# Altium PCB EHR.PcbDoc (part 4 of 4)
Units mm, origin at the board's own origin, x right, y up, seen from the top; angles counter-clockwise.
Board outline 200 x 110 mm, 2 copper layers (Top Layer, Bottom Layer), stack 1.646 mm thick; 17 components, 171 nets, 955 pads, 288 vias.
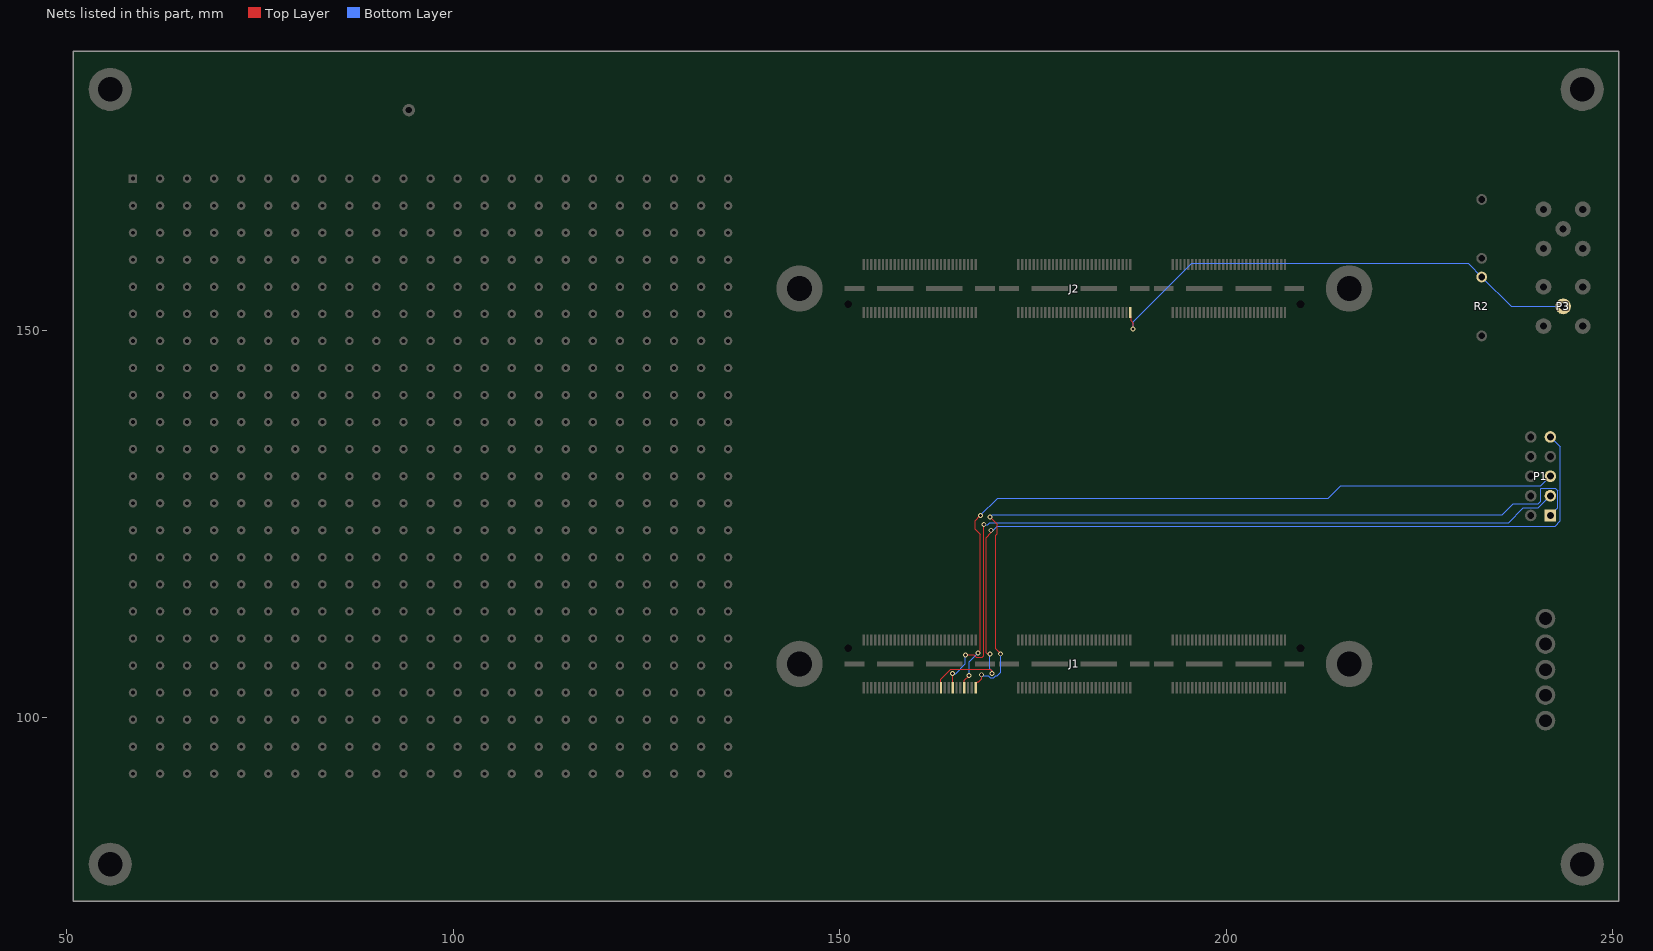
[diagram p4: the nets of this part, all layers, seen from the top]

## Via types
v1: diameter 0.64, hole 0.39, Top Layer to Bottom Layer, 288 vias

## Nets (pads, with @x,y where several pads share a name; then routed paths per layer and width w, separated by ;. In a path a pad name is that pad's centre, name@x,y a point inside that pad or via, vN(x,y) a via of type N, cw(c..) or ccw(c..) an arc to the next point about the centre after c; other vN are vias at no path point) (continued)
JTAG_TCK: J1.60 P1.1 | length 105.5
  Top Layer w0.15: J1.60@167.593,103.829 167.593,104.394 167.822,104.623 167.957,104.623 168.351,105.016 v1(168.351,105.512) ; v1(169.404,125.928) 170.344,124.988 170.344,123.726 170.171,123.553 170.171,108.869 v1(170.815,108.225)
  Bottom Layer w0.15: v1(168.351,105.512) 168.49,105.373 169.192,105.373 169.446,105.119 169.898,105.119 170.152,105.373 170.372,105.373 170.815,105.816 v1(170.815,108.225) ; v1(169.404,125.928) 169.714,126.238 235.737,126.238 237.16,127.66 240.347,127.66 240.665,127.978 240.665,129.565 240.741,129.642 242.57,129.642 242.91,129.302 242.91,127.095 P1.1@241.935,126.12
JTAG_TDI: J1.42 P1.9 | length 113.6
  Top Layer w0.15: J1.42@163.09,103.829 163.09,104.932 164.366,106.209 169.482,106.209 169.672,106.019 v1(169.672,105.664) ; v1(169.418,108.204) 169.088,108.204 168.924,108.368 168.924,123.267 169.608,123.952 169.545,124.015 v1(169.545,124.206)
  Bottom Layer w0.15: v1(169.418,108.204) 169.418,106.273 169.672,106.019 v1(169.672,105.664) ; v1(169.545,124.206) 169.736,124.206 169.799,124.142 170.396,124.739 242.545,124.739 243.21,125.405 243.21,135.005 P1.9@241.935,136.28
JTAG_TDO: J1.48 P1.3 | length 99.6
  Top Layer w0.15: J1.48@164.591,103.829 J1.48@164.591,103.829 v1(164.592,105.664) ; v1(166.243,108.077) 167.326,108.077 167.643,107.761 168.41,107.761 168.416,107.755 168.624,107.963 v1(168.624,124.936)
  Bottom Layer w0.15: v1(164.592,105.664) 164.997,105.664 166.243,106.91 v1(166.243,108.077) ; v1(168.624,124.936) 169.132,124.936 169.393,125.197 236.525,125.197 238.43,127.102 240.377,127.102 P1.3@241.935,128.66
JTAG_TMS: J1.54 P1.5 | length 99.6
  Top Layer w0.15: J1.54@166.092,103.829 166.092,104.775 v1(166.727,105.41) ; v1(167.869,108.306) 168.199,108.636 168.199,123.698 168.148,123.698 167.513,124.333 167.513,125.451 v1(168.199,126.136)
  Bottom Layer w0.15: v1(166.727,105.41) 166.727,107.164 v1(167.869,108.306) ; v1(168.199,126.136) 170.419,128.356 213.218,128.356 214.796,129.935 240.67,129.935 P1.5@241.935,131.2
TRG_IN: J2.61 P3.1 R2.2 | length 64.3
  Top Layer w0.15: J2.61@187.596,152.399 187.621,151.359 187.96,151.02 v1(187.96,150.241)
  Bottom Layer w0.15: v1(187.96,150.241) 187.96,151.181 195.504,158.725 231.292,158.725 R2.2@233.045,156.972 236.855,153.162 P3.1@243.586,153.162
pads on no net: J1.1 J1.2 J1.3 J1.4 J1.5 J1.7 J1.8 J1.9 J1.10 J1.11 J1.13 J1.14 J1.15 J1.16 J1.17 J1.18 J1.19 J1.20 J1.21 J1.22 J1.23 J1.24 J1.25 J1.26 J1.27 J1.28 J1.29 J1.30 J1.31 J1.32 J1.33 J1.34 J1.35 J1.36 J1.37 J1.38 J1.39 J1.40 J1.41 J1.43 J1.44 J1.45 J1.46 J1.47 J1.49 J1.50 J1.51 J1.52 J1.53 J1.55 J1.56 J1.57 J1.58 J1.59 J1.193 J1.194 J2.1 J2.2 J2.3 J2.4 J2.5 J2.6 J2.7 J2.8 J2.9 J2.10 J2.11 J2.12 J2.13 J2.14 J2.15 J2.16 J2.17 J2.18 J2.19 J2.20 J2.21 J2.22 J2.23 J2.24 J2.25 J2.26 J2.27 J2.28 J2.29 J2.30 J2.31 J2.32 J2.33 J2.34 J2.35 J2.36 J2.37 J2.38 J2.39 J2.40 J2.41 J2.42 J2.43 J2.44 J2.45 J2.46 J2.47 J2.49 J2.50 J2.51 J2.52 J2.53 J2.54 J2.55 J2.56 J2.57 J2.59 J2.60 J2.193 J2.194 P1.6 P1.7 P1.8

## Keep-outs
Keep-Out Layer:
  lines w0.3: 52.1,77.5 52.1,184.9 249.5,184.9 249.5,77.5 52.1,77.5

## Silkscreen, mask and mechanical layers (free items; w line width, h text height)
Top Overlay:
  text "GND" at 92.329,180.213 h2
  text "EHR" at 145.8,177.038 h5
  text "CLK_IN" at 237.617,168.656 h2
  text "50Ω" at 231.521,161.671 h2 r90
  text "J2_62" at 67.818,160.274 h1
  text "J2_63" at 74.803,160.274 h1
  text "J2_67" at 88.9,160.274 h1
  text "J2_68" at 95.885,160.274 h1
  text "J2_69" at 102.87,160.274 h1
  text "J2_70" at 109.855,160.274 h1
  text "J2_73" at 116.84,160.274 h1
  text "J2_74" at 123.952,160.274 h1
  text "J2_64" at 82.931,160.147 h1
  text "J2_75" at 64.389,156.845 h1
  text "J2_76" at 71.374,156.845 h1
  text "J2_79" at 78.359,156.718 h1
  text "J2_80" at 85.344,156.718 h1
  text "J2_81" at 92.329,156.718 h1
  text "J2_82" at 99.314,156.718 h1
  text "J2_85" at 106.299,156.718 h1
  text "J2_86" at 113.284,156.718 h1
  text "J2_87" at 120.396,156.718 h1
  text "J2_88" at 67.818,153.289 h1
  text "J2_91" at 74.803,153.289 h1
  text "J2_92" at 81.788,153.289 h1
  text "J2_93" at 88.773,153.289 h1
  text "J2_94" at 95.885,153.289 h1
  text "J2_97" at 102.87,153.289 h1
  text "J2_98" at 109.855,153.289 h1
  text "J2_99" at 116.84,153.289 h1
  text "J2_100" at 123.571,153.289 h1
  text "50Ω" at 231.521,151.638 h2 r90
  text "J2_105" at 78.232,149.86 h1
  text "J2_109" at 91.821,149.86 h1
  text "J2_116" at 127,149.86 h1
  text "J2_103" at 64.135,149.733 h1
  text "J2_104" at 71.12,149.733 h1
  text "J2_106" at 84.963,149.733 h1
  text "J2_110" at 98.933,149.733 h1
  text "J2_111" at 106.045,149.733 h1
  text "J2_112" at 112.903,149.733 h1
  text "J2_115" at 120.015,149.733 h1
  text "TRG_IN" at 237.19,146.431 h2
  text "J2_117" at 67.691,146.304 h1
  text "J2_118" at 74.422,146.304 h1
  text "J2_121" at 81.534,146.304 h1
  text "J2_122" at 88.519,146.304 h1
  text "J2_123" at 96.012,146.304 h1
  text "J2_124" at 102.489,146.304 h1
  text "J2_127" at 109.601,146.304 h1
  text "J2_128" at 116.586,146.304 h1
  text "J2_129" at 123.571,146.304 h1
  text "J2_130" at 64.008,142.748 h1
  text "J2_133" at 70.993,142.748 h1
  text "J2_134" at 77.47,142.748 h1
  text "J2_135" at 84.963,142.748 h1
  text "J2_136" at 92.71,142.748 h1
  text "J2_139" at 99.06,142.748 h1
  text "J2_140" at 107.061,142.748 h1
  text "J2_141" at 113.157,142.748 h1
  text "J2_142" at 120.015,142.748 h1
  text "J2_145" at 127,142.748 h1
  text "J2_151" at 88.519,139.446 h1
  text "J2_146" at 67.564,139.319 h1
  text "J2_148" at 81.407,139.319 h1
  text "J2_152" at 95.377,139.319 h1
  text "J2_153" at 102.489,139.319 h1
  text "J2_154" at 110.49,139.319 h1
  text "J2_157" at 116.586,139.319 h1
  text "J2_158" at 123.571,139.319 h1
  text "J2_147" at 74.041,139.065 h1
  text "J2_159" at 64.008,135.763 h1
  text "J2_160" at 70.993,135.763 h1
  text "J2_163" at 77.978,135.763 h1
  text "J2_164" at 84.963,135.763 h1
  text "J2_165" at 91.821,135.763 h1
  text "J2_166" at 98.933,135.763 h1
  text "J2_169" at 105.918,135.763 h1
  text "J2_170" at 113.03,135.763 h1
  text "J2_171" at 120.015,135.763 h1
  text "J2_172" at 126.873,135.763 h1
  text "J2_175" at 67.437,132.334 h1
  text "J2_178" at 88.9,132.334 h1
  text "J1_61" at 95.758,132.334 h1
  text "J1_62" at 102.743,132.334 h1
  text "J1_63" at 109.855,132.334 h1
  text "J1_64" at 116.84,132.334 h1
  text "J2_176" at 74.422,132.207 h1
  text "J2_177" at 81.534,132.207 h1
  text "J1_67" at 123.825,132.207 h1
  text "J1_68" at 64.262,128.778 h1
  text "J1_69" at 71.374,128.778 h1
  text "J1_70" at 78.232,128.778 h1
  text "J1_73" at 85.217,128.778 h1
  text "J1_74" at 92.329,128.778 h1
  text "J1_75" at 99.187,128.778 h1
  text "J1_76" at 106.299,128.778 h1
  text "J1_79" at 113.284,128.778 h1
  text "J1_80" at 120.396,128.778 h1
  text "J1_81" at 127.381,128.778 h1
  text "JTAG" at 246.38,127.762 h3 r90
  text "J1_87" at 88.9,125.349 h1
  text "J1_82" at 67.818,125.222 h1
  text "J1_85" at 74.803,125.222 h1
  text "J1_86" at 81.788,125.222 h1
  text "J1_88" at 95.758,125.222 h1
  text "J1_91" at 102.87,125.222 h1
  text "J1_92" at 109.855,125.222 h1
  text "J1_93" at 116.84,125.222 h1
  text "J1_94" at 123.825,125.222 h1
  text "J1_97" at 64.389,121.793 h1
  text "J1_98" at 71.374,121.793 h1
  text "J1_99" at 78.232,121.793 h1
  text "J1_100" at 85.217,121.793 h1
  text "J1_103" at 92.075,121.793 h1
  text "J1_104" at 99.06,121.793 h1
  text "J1_106" at 113.03,121.793 h1
  text "J1_109" at 120.015,121.793 h1
  text "J1_110" at 127,121.793 h1
  text "J1_105" at 106.045,121.666 h1
  text "J1_122" at 116.967,118.364 h1
  text "J1_111" at 67.564,118.237 h1
  text "J1_112" at 74.422,118.237 h1
  text "J1_115" at 81.534,118.237 h1
  text "J1_116" at 88.519,118.237 h1
  text "J1_117" at 95.504,118.237 h1
  text "J1_118" at 102.489,118.237 h1
  text "J1_121" at 109.474,118.237 h1
  text "J1_123" at 123.571,118.237 h1
  text "J1_124" at 64.008,114.808 h1
  text "J1_127" at 70.993,114.808 h1
  text "J1_128" at 77.978,114.808 h1
  text "J1_129" at 85.09,114.808 h1
  text "J1_130" at 92.075,114.808 h1
  text "J1_133" at 99.06,114.808 h1
  text "J1_134" at 106.045,114.808 h1
  text "J1_135" at 113.03,114.808 h1
  text "J1_136" at 120.015,114.808 h1
  text "J1_139" at 127.127,114.808 h1
  text "+3.3VDD" at 232.033,112.141 h2
  text "J1_151" at 116.84,111.379 h1
  text "J1_140" at 67.564,111.252 h1
  text "J1_141" at 74.549,111.252 h1
  text "J1_142" at 81.534,111.252 h1
  text "J1_145" at 88.519,111.252 h1
  text "J1_146" at 95.504,111.252 h1
  text "J1_147" at 102.616,111.252 h1
  text "J1_148" at 109.474,111.252 h1
  text "J1_152" at 123.444,111.252 h1
  text "+1.8VDD" at 232.033,108.839 h2
  text "J1_153" at 64.008,107.823 h1
  text "J1_154" at 71.12,107.823 h1
  text "J1_157" at 78.105,107.823 h1
  text "J1_158" at 84.963,107.823 h1
  text "J1_159" at 92.075,107.823 h1
  text "J1_160" at 98.933,107.823 h1
  text "J1_163" at 106.045,107.823 h1
  text "J1_164" at 113.03,107.823 h1
  text "J1_165" at 120.015,107.823 h1
  text "+2.5VDD" at 232.033,105.664 h2
  text "J1_166" at 67.564,104.267 h1
  text "J1_169" at 74.549,104.267 h1
  text "J1_170" at 81.407,104.267 h1
  text "J1_171" at 88.646,104.267 h1
  text "J1_172" at 95.504,104.267 h1
  text "J1_175" at 102.489,104.267 h1
  text "J1_176" at 109.474,104.267 h1
  text "J1_177" at 116.459,104.267 h1
  text "J1_178" at 123.571,104.267 h1
  text "+12.0VDC" at 231.013,102.362 h2
  text "+1.2VDD" at 232.029,98.933 h2

## Dimensions
52.1,77.5 to 52.1,184.9 on Mechanical 1
52.1,77.5 to 249.5,77.5 on Mechanical 1

## Text inside footprints (layer, text, board x,y; h text height)
J2: Mechanical 1 "J1" at 180.837,155.993 h0.76 r180
P1: Top Overlay "10" at 239.903,138.058 h1.27 r90; Top Overlay "9" at 242.443,138.312 h1.27 r90; Top Overlay "1" at 242.57,123.707 h1.27 r90; Top Overlay "2" at 239.903,123.453 h1.27 r90